# Altium PCB KRing_B4_A1.PcbDoc
Units mil, origin at the board's own origin, x right, y up, seen from the top; angles counter-clockwise.
Board outline 1488.19 x 1488.19 mil, 2 copper layers (Top Layer, Bottom Layer), stack 42.17 mil thick; 78 components, 48 nets, 279 pads, 213 vias.
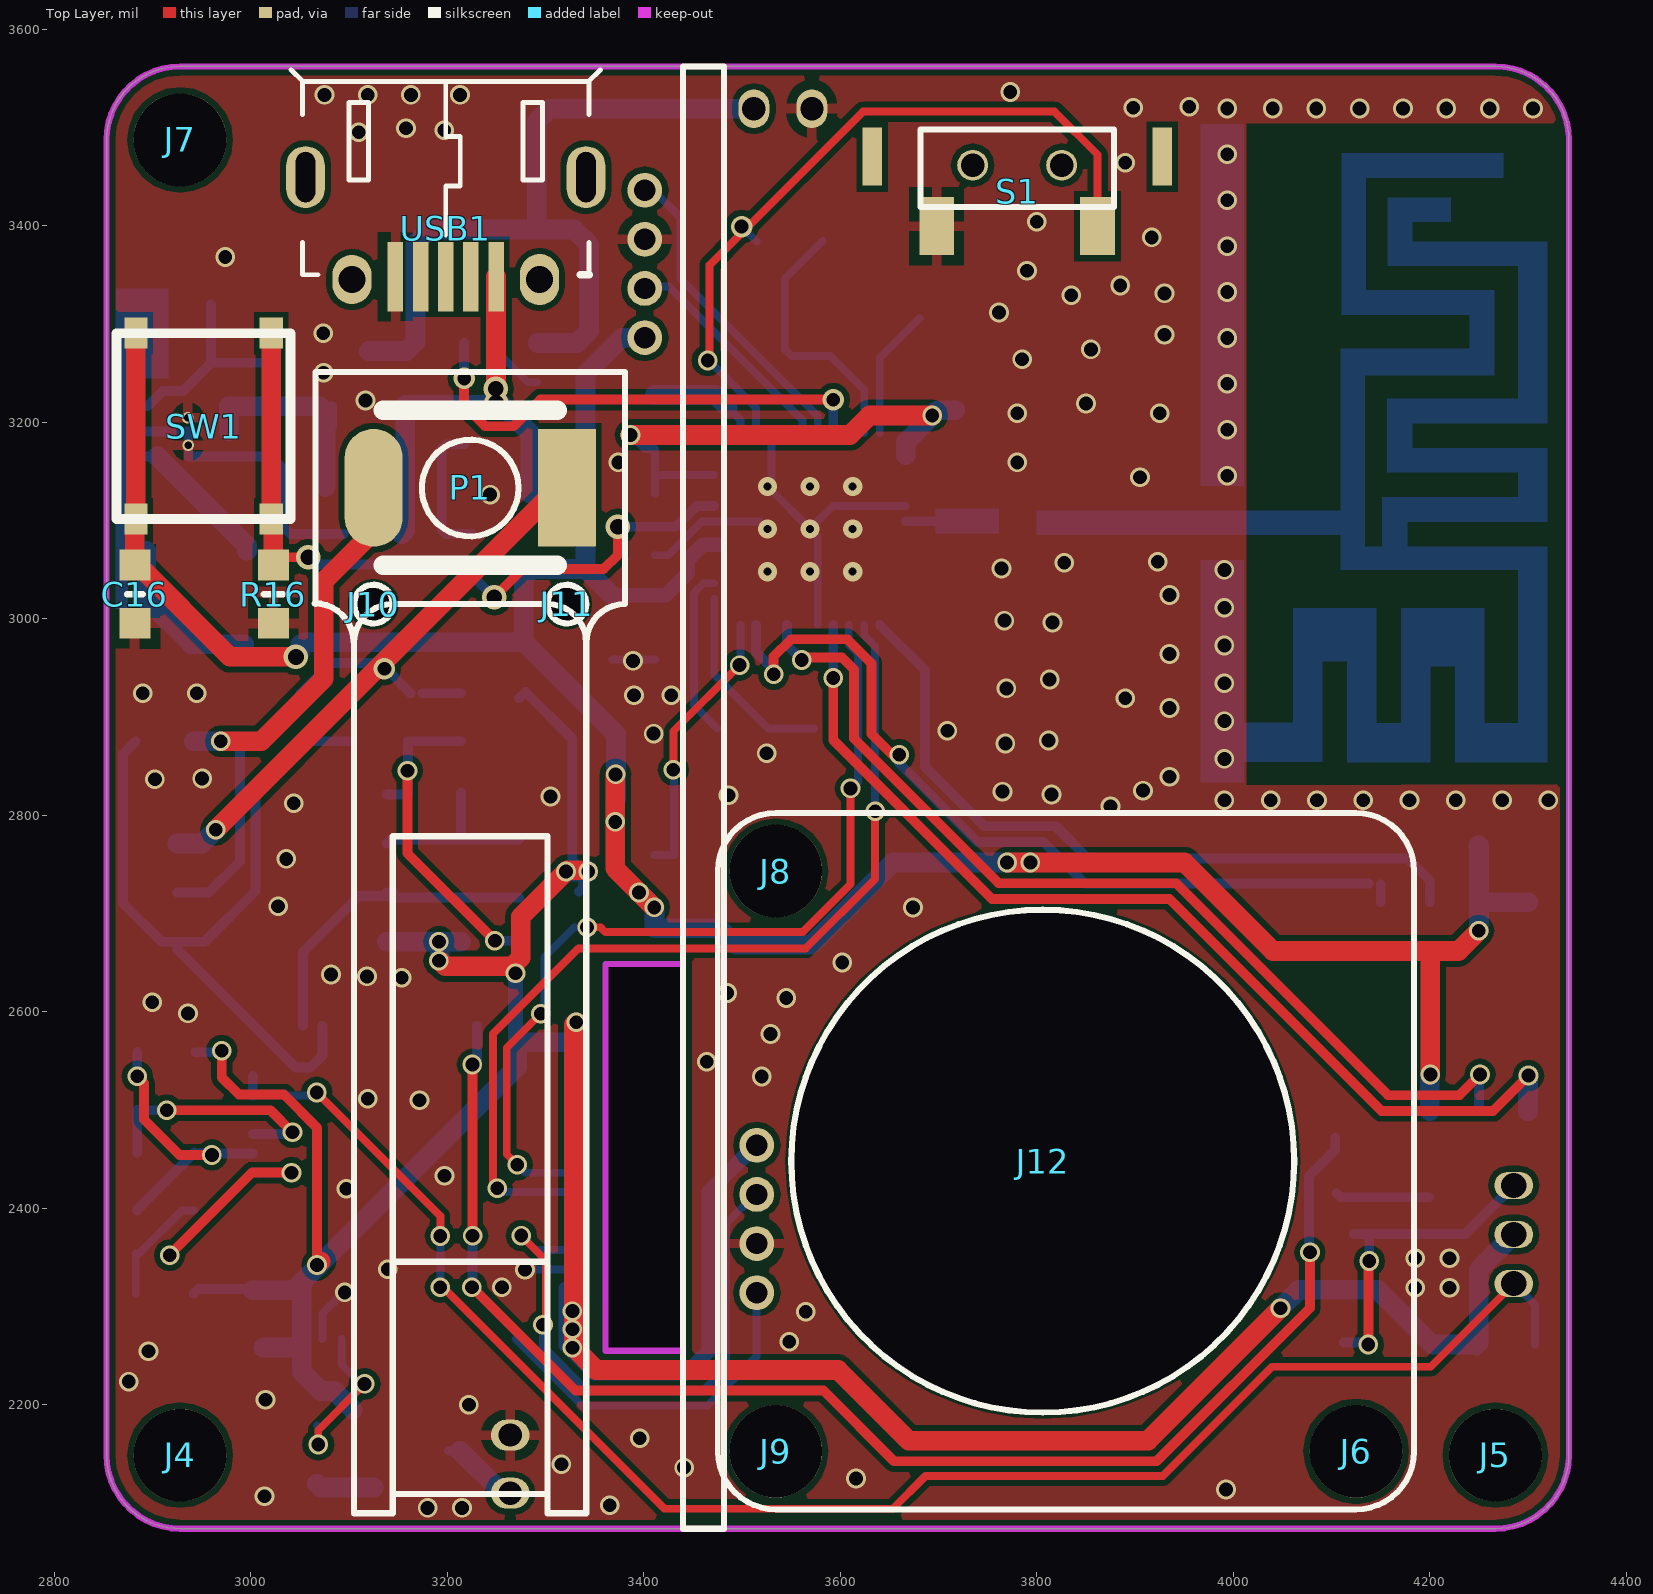
[diagram p0: Top Layer view]
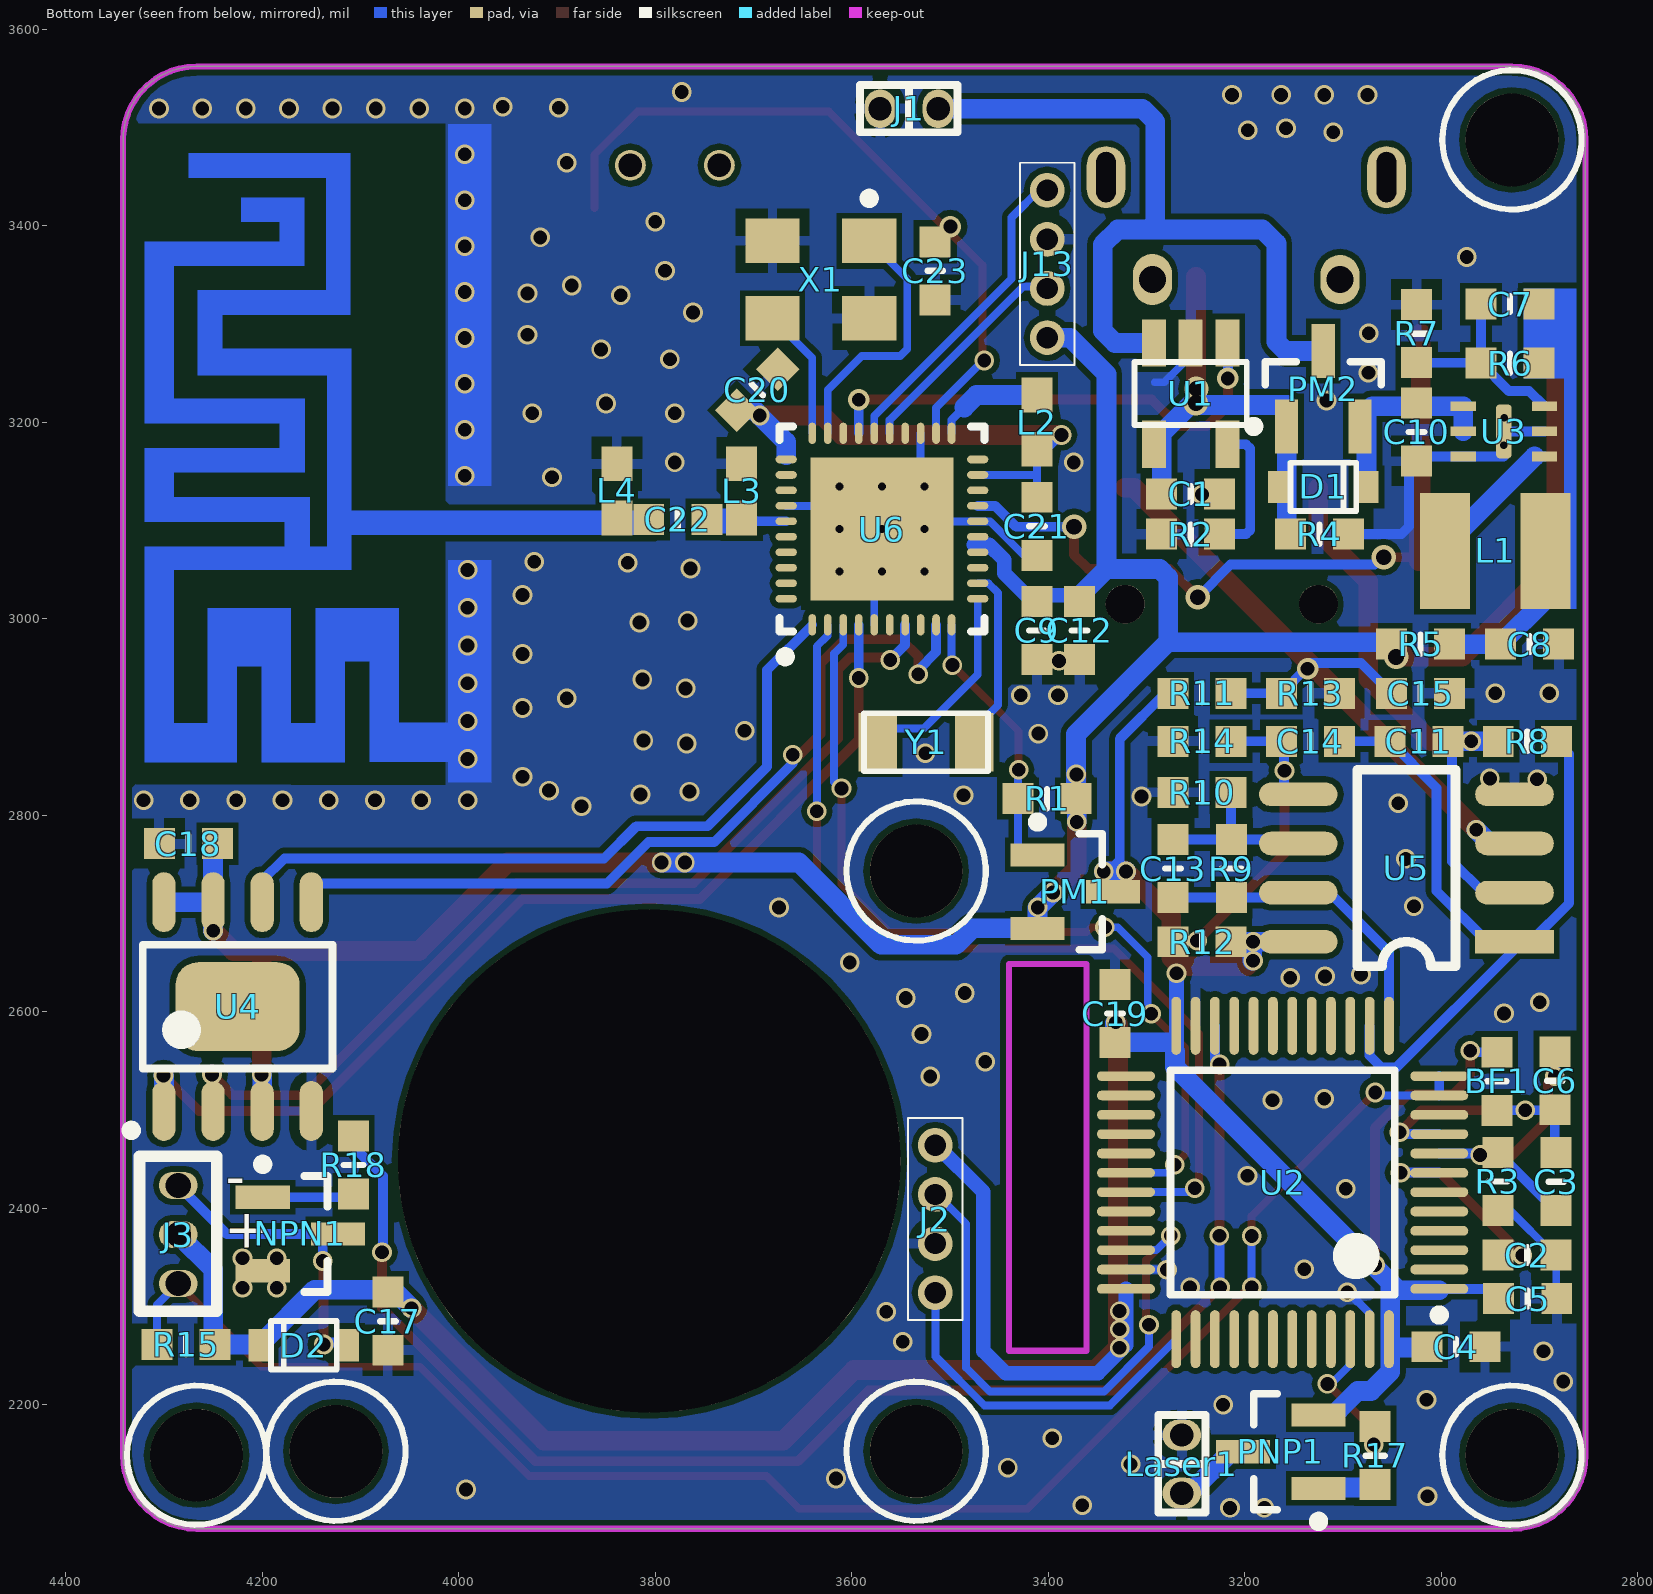
[diagram p1: Bottom Layer view, seen from below]

## Layer stack, top to bottom
Top Layer: signal copper 1.4
Dielectric: core 39.3701, FR-4, Dk 4.8
Bottom Layer: signal copper 1.4

## Board outline
2853.27,2148.65 2853.27,3487.23 cw(c2928.07,3487.23) 2928.07,3562.03 4266.65,3562.03 cw(c4266.65,3487.23) 4341.46,3487.23 4341.46,2148.65 cw(c4266.65,2148.65) 4266.65,2073.84 2928.07,2073.84 cw(c2928.07,2148.65)
cut-out: 3361.47,2648.19 3440.47,2648.19 3440.47,2255.19 3361.47,2255.19

## Design rules (kind name [scope] priority, off if disabled: settings)
Clearance "6mil Special" [(HasFootprint('FPC 0.5mm 4P') OR HasFootprint('FPC 0.5mm 16P') OR HasFootprint('QFN40P500X500X90_HS-41L'))] p1: gap=6
Clearance "8mil all" [All] p2: gap=6
ComponentClearance [All] p1: gap=-3937.01 collisioncheckmode=3 verticalgap=10 showdistances=FALSE
Height [All] p1: minheight=0 maxheight=2000 prefheight=500
HoleSize [All] p1: absolutevalues=TRUE maxlimit=71537.31 minlimit=0 maxpercent=80.000 minpercent=20.000
HoleToHoleClearance [All] p1: gap=8 allowstackedmicrovias=TRUE
MinimumSolderMaskSliver [All] p1: minsoldermaskwidth=0
PolygonConnect PolygonConnect_1 [isvia] p1: connectstyle=Direct reliefconductorwidth=10 reliefentries=4 polygonreliefangle="90 Angle" airgapwidth=10
PolygonConnect [All] p2: connectstyle=Relief reliefconductorwidth=10 reliefentries=4 polygonreliefangle="90 Angle" airgapwidth=10
RoutingCorners [All] p1: cornerstyle=45-Degree minsetback=10 maxsetback=100
RoutingVias [All] p1: holewidth=14 width=20 viastyle="Through Hole" minholewidth=14 minwidth=20 maxholewidth=100 maxwidth=200
SilkToSilkClearance [All] p1: silktosilkclearance=0
SilkToSolderMaskClearance [IsPad] p1: minsilkscreentomaskgap=0 clearancetoexposedcopper=TRUE
SolderMaskExpansion [All] p1: expansion=4
Width 20mil_Power [(InNet('EP_SUPPLY&VBAT') OR InNet('PSUPPLY') OR InNet('P_3.3V') OR InNet('PSUPPLYBAT') OR InNet('P_3.3V') OR InNet('P_5V'))] p1: maxlimit=39370.08 minlimit=8 preferedwidth=20
Width 8mil_Basic [All] p2: maxlimit=3937.01 minlimit=8 preferedwidth=10
20 further rules are at their usual default settings.

## Components (designator, comment, footprint, x,y, rotation, side; value= is the part's Value field where it differs from the comment)
BF1 "BF" R0603 2943.47,2529.19 r90 bottom
C1 "1uf" C0603 3255,3127 r180 bottom
C2 "1uf" C0603 2912.53,2352.19 r0 bottom
C3 "1uf" C0603 2883,2427 r90 bottom (schematic designator C4)
C4 "1uf" C0603 2985,2259 r0 bottom
C5 "1uf" C0603 2912,2308 r0 bottom (schematic designator C7)
C6 "0.1uf" C0603 2884.47,2529.71 r270 bottom (schematic designator C21)
C7 "22pf" C0603 2930,3320 r0 bottom
C8 "1uf" C0603 2910,2974 r180 bottom
C9 "1uf" C0603 3411.47,2988 r270 bottom
C10 "6.8pF" C0603 3025,3190 r270 bottom
C11 "6.8pf" C0603 3022.8,2875.19 r180 bottom
C12 "10uf" C0603 3368,2988 r90 bottom
C13 "240pF" C0603 3273,2745.71 r90 bottom
C14 "0.15uf" C0603 3133.13,2875.19 r180 bottom
C15 "1uf" C0603 3021,2924 r180 bottom
C16 "1uf" C0603 2882,3024.84 r270 top
C17 "1uf" C0603 4072,2285 r270 bottom
C18 "10uf" C0603 4275,2771 r180 bottom
C19 "10uf" C0603 3332,2598 r270 bottom
C20 "1uf" C0603 3696,3233 r135 bottom
C21 "1uf" C0603 3411.47,3094 r270 bottom
C22 "10uf" C0603 3777,3101 r0 bottom
C23 "10uf" C0603 3515,3354 r90 bottom
D1 "1N5817" SOD323(0805) 3120,3134 r180 bottom
D2 "1N5817" SOD323(0805) 4157.6,2260.54 r0 bottom
J1 "CON2" BATTRY_CONNECTOR 3512,3519 r0 bottom
J2 "CON4" "CON4 1MM" 3515,2389 r90 bottom
J3 "CON3" "Motor Connector" 4285.38,2373.23 r270 bottom
J4 "CON1" 2.4mm#1 2928.07,2148.19 r0 top
J5 "CON1" 2.4mm#2 4270.47,2148.19 r0 top
J6 "CON1" 2.4mm#3 4126.47,2155.19 r0 top
J7 "CON1" 2.4mm#4 2931.47,3488.19 r0 top
J8 "CON1" 2.4mm#5 3534.47,2743.19 r0 top
J9 "CON1" 2.4mm#6 3529.47,2154.19 r0 top
J10 "CON1" 0.5mm 3124.92,3014.79 r0 top
J11 "CON1" 0.5mm 3321.77,3014.79 r0 top
J12 "CON1" 6.5mm 3808.47,2450.19 r0 top
J13 "CON4" "CON4 1MM" 3401,3361 r270 bottom
L1 "4.7uh" GDNR3012 2945,3069 r90 bottom
L2 "2.2uh" L0603 3411.47,3200.02 r270 bottom
L3 "NC" L0603 3712,3130 r270 bottom
L4 "NC" L0603 3839,3130 r270 bottom
Laser1 "Laser" BATTRY_CONNECTOR 3264,2110 r90 bottom
NPN1 "8050" SOT23-3 4161,2373.82 r180 bottom
P1 "photodetector" BPW34 3223.47,3133.19 r180 top
PM1 "Si2303" SOT23-3 3372.44,2722.15 r180 bottom
PM2 "Si2303" SOT23-3 3120,3234 r90 bottom
PNP1 "8550" SOT23-3 3163.27,2152.16 r0 bottom
R1 "1K" R0603 3401.18,2816.87 r180 bottom
R2 "1K" R0603 3255,3086 r180 bottom
R3 "1K" R0603 2942.47,2427.19 r90 bottom (schematic designator R14)
R4 "1K" R0603 3124,3086 r180 bottom
R5 "1K" R0603 3021,2974 r180 bottom
R6 "1K" R0603 2930,3260 r180 bottom
R7 "1K" R0603 3025,3290 r90 bottom
R8 "10M" R0603 2912.47,2875.19 r180 bottom
R9 "220K" R0603 3213.47,2745.71 r270 bottom
R10 "3K" R0603 3243.47,2823.19 r180 bottom
R11 "4.7K" R0603 3243.47,2924 r0 bottom (schematic designator R6)
R12 "2M" R0603 3243.47,2671.19 r180 bottom
R13 "1K" R0603 3133.13,2924 r0 bottom
R14 "510" R0603 3243.47,2875.19 r180 bottom
R15 "1K" R0603 4277.38,2261.23 r180 bottom
R16 "1K" R0603 3023.07,3024.84 r270 top
R17 "1K" R0603 3067.27,2148.16 r90 bottom
R18 "1K" R0603 4107,2444 r90 bottom
S1 "SW_Mini" SW_Mini 3780,3450.54 r180 top
SW1 "SW_MINI2" SW_MINI2 2952,3196 r270 top
U1 "LTC4054" LTC4054 3255,3229 r0 bottom
U2 "STM32F103C8T6" TSQFP50P900X900X160-48L 3161.47,2426.19 r0 bottom
U3 "TPS62260" QFN2X2-6 2895,3165 r0 bottom
U4 "W25X20CLSNIG" SOIC8 4224.92,2605.18 r90 bottom
U5 "LMC6482" LMC6482 2925.47,2671.19 r0 bottom
U6 "DA14580-01AT1" QFN40P500X500X90_HS-41L 3569.21,3091.17 r90 bottom
USB1 "MicroUSB" MICROUSB 3198.47,3397.19 r270 top locked
X1 "3225 16Mhz" 3225 3631.38,3345.06 r270 bottom
Y1 "FC-135" FC-135 3524.37,2874.2 r0 bottom

## Footprints (in the part's own frame and the unit in brackets; to place one, negate y for a bottom-side part, rotate by r counter-clockwise, add the part's x,y. Pads: shape width x height; smd on the part's side, far side on the other; paste and mask are expansions set on the pad)
0.5mm [mm]
  round 1 hole 1: 1(0,0)
2.4mm#1 [mm]
  round 2.4 hole 2.4: 1(0,0.012)
2.4mm#2 [mm]
  round 2.4 hole 2.4: 1(-0.097,0.012)
2.4mm#3 [mm]
  round 2.4 hole 2.4: 1(-0.039,-0.066)
2.4mm#4 [mm]
  round 2.4 hole 2.4: 1(-0.086,-0.024)
2.4mm#5 [mm]
  round 2.4 hole 2.4: 1(-0.002,-0.001)
2.4mm#6 [mm]
  round 2.4 hole 2.4: 1(0.125,-0.041)
6.5mm [mm]
  round 13 hole 13 unplated: ""(-0.062,-0.059)
3225 [mm]
  rect 1.15x1.4 smd: 1(-1,1.25) 2(-1,-1.25) 3(1,-1.25) 4(1,1.25)
  silkscreen extent -2.22,1.13 -1.98,1.37, body extent -1.25,-1.6 1.25,1.6, height 0.7
BATTRY_CONNECTOR [mm]
  oval 0.8x1 hole 0.6: 1(0,0) 2(1.5,0)
  silkscreen extent -0.5,-0.61 2.02,0.61
BPW34 [mm]
  rect 1.5x3.048 smd: A(-2.5,0)
  oval 1.5x3.048 smd: C(2.5,0)
  silkscreen extent -2.25,-2 2.25,2
C0603 [mm]
  rect 0.8x0.8 smd: 1(-0.75,0) 2(0.75,0)
  silkscreen extent 0,-0.2 0,0.2, body extent -0.8,-0.4 0.8,0.4, height 0.8
"CON4 1MM" [mm]
  round 0.9 hole 0.55: 1(-1.905,0) 2(-0.635,0) 3(0.635,0) 4(1.905,0)
  silkscreen extent -2.62,-0.7 2.62,0.7
FC-135 [mm]
  rect 1x1.5 smd: 1(-1.25,0) 2(1.25,0)
  silkscreen extent -1.6,-0.75 1.6,0.75, body extent -1.6,-0.75 1.6,0.75, height 0.8
GDNR3012 [mm]
  rect 3x1.3 smd: 1(0,1.3) 2(0,-1.3)
  body extent -1.5,-1.5 1.5,1.5, height 1.2
L0603 [mm]
  rect 0.9x0.8 smd: 1(-0.7,0) 2(0.7,0)
  body extent -0.8,-0.4 0.8,0.4, height 0.8
LMC6482 [mil]
  rect 80x24 smd: 1(0,0)
  oval 80x24 smd: 2(0,-50) 3(0,-100) 4(0,-150) 5(220,-150) 6(220,-100) 7(220,-50) 8(220,0)
  silkscreen extent 60,-175 160,25, body extent 24,-176 196,27, height 43
LTC4054 [mm] "TSQFP, 48-Leads, Body 7.00x7.00mm, Pitch 0.50mm, IPC High Density"
  rect 0.62x1.22 smd: 1(-0.95,-1.31) 2(0,-1.31) 3(0.95,-1.31) 4(0.95,1.31) 5(-0.95,1.31)
  silkscreen extent -1.45,-0.81 1.45,0.81, body extent -1.45,-0.82 1.45,0.81, height 1
MICROUSB [mm]
  oval 1.6x1 hole 0.5 slot 1.3 at 0 deg unplated: 0(-1.325,3.625) 0(-1.325,-3.625)
  rect 1.8x0.4 smd: 1(1.25,1.3) 2(1.25,0.65) 3(1.25,0) 4(1.25,-0.65) 5(1.25,-1.3)
  oval 1.321x1.016 hole 0.7 unplated: ""(1.325,2.425)
  oval 1.27x1.016 hole 0.7 unplated: ""(1.325,-2.425)
  silkscreen extent -4.1,-4 1.2,4, body extent -3.62,-3.96 1.81,4.02, height 2.99
"Motor Connector" [mm]
  oval 0.7x1 hole 0.65: 1(-1.27,0) 2(0,0) 3(1.27,0)
  silkscreen extent -2.02,-1 1.98,1
QFN2X2-6 [mm]
  rect 0.65x0.25 smd: 1(0,0) 2(0,-0.65) 3(0,-1.3) 4(2.1,-1.3) 5(2.1,-0.65) 6(2.1,0)
  round 0.3 hole 0.2: 7(1.04,-1) 7(1.05,-0.29)
  rrect50% 0.4x1.4 smd: 7(1.05,-0.65)
  body extent 0.22,-1.59 1.86,0.29, height 0.8
QFN40P500X500X90_HS-41L [mm] "QFN, 40-Leads, Body 5.00x5.00mm, Pitch 0.40mm, Thermal Pad 3.70x3.70mm, IPC High Density"
  oval 0.55x0.2 smd: 1(-2.475,1.8) 2(-2.475,1.4) 3(-2.475,1) 4(-2.475,0.6) 5(-2.475,0.2) 6(-2.475,-0.2) 7(-2.475,-0.6) 8(-2.475,-1) 9(-2.475,-1.4) 10(-2.475,-1.8) 21(2.475,-1.8) 22(2.475,-1.4) 23(2.475,-1) 24(2.475,-0.6) 25(2.475,-0.2) 26(2.475,0.2) 27(2.475,0.6) 28(2.475,1) 29(2.475,1.4) 30(2.475,1.8)
  oval 0.2x0.55 smd: 11(-1.8,-2.475) 12(-1.4,-2.475) 13(-1,-2.475) 14(-0.6,-2.475) 15(-0.2,-2.475) 16(0.2,-2.475) 17(0.6,-2.475) 18(1,-2.475) 19(1.4,-2.475) 20(1.8,-2.475) 31(1.8,2.475) 32(1.4,2.475) 33(1,2.475) 34(0.6,2.475) 35(0.2,2.475) 36(-0.2,2.475) 37(-0.6,2.475) 38(-1,2.475) 39(-1.4,2.475) 40(-1.8,2.475)
  rect 3.7x3.7 smd: 41(0,0)
  silkscreen extent -3.42,-2.65 2.65,2.65, body extent -2.5,-2.5 2.5,2.5, height 0.9
R0603 [mm]
  rect 0.8x0.8 smd: 1(-0.75,0) 2(0.75,0)
  silkscreen extent 0,-0.25 0,0.25, body extent -0.8,-0.4 0.8,0.4, height 0.5
SOD323(0805) [mm]
  rect 0.63x0.83 smd: A(-1.115,0) C(1.115,0)
  silkscreen extent -0.85,-0.63 0.85,0.63, body extent -0.85,-0.63 0.86,0.63, height 1.1
SOIC8 [mm] "QFN, 40-Leads, Body 5.00x5.00mm, Pitch 0.40mm, Thermal Pad 3.70x3.70mm, IPC High Density"
  oval 1.55x0.6 smd: 1(-2.7,1.905) 2(-2.7,0.635) 3(-2.7,-0.635) 4(-2.7,-1.905) 5(2.7,-1.905) 6(2.7,-0.635) 7(2.7,0.635) 8(2.7,1.905)
  rrect50% 2.3x3.2 smd: 9(0,0)
  silkscreen extent -3.32,-2.45 1.6,2.88, body extent -1.65,-2.41 1.65,2.41, height 1.35
SOT23-3 [mm]
  rect 1.4x0.6 smd: 1(-0.975,0.95) 2(-0.975,-0.95) 3(0.975,0)
  silkscreen extent -1.1,-1.5 0.7,1.92, body extent -0.7,-1.5 0.7,1.5, height 1
SW_Mini [mm]
  rect 0.9x1.5 smd: 1(2.08,1.3) 2(-2.08,1.3)
  rect 0.5x1.5 smd: ""(-3.75,-0.5) ""(3.75,-0.5)
  round 0.8 hole 0.6: ""(-1.15,-0.277) ""(1.15,-0.277)
  silkscreen extent -2.5,-1.2 2.5,0.8, body extent -3.76,-2.28 3.74,1.72, height 3.4
SW_MINI2 [mm]
  rect 0.8x0.6 smd: 1(-2.4,1.75) 2(2.4,1.75) 3(-2.4,-1.75) 4(2.4,-1.75)
  silkscreen extent -2.4,-2.25 2.4,2.25, body extent -2.4,-2.28 2.4,2.25, height 0.5
TSQFP50P900X900X160-48L [mm] "TSQFP, 48-Leads, Body 7.00x7.00mm, Pitch 0.50mm, IPC High Density"
  oval 1.5x0.25 smd: 1(-4.05,2.75) 2(-4.05,2.25) 3(-4.05,1.75) 4(-4.05,1.25) 5(-4.05,0.75) 6(-4.05,0.25) 7(-4.05,-0.25) 8(-4.05,-0.75) 9(-4.05,-1.25) 10(-4.05,-1.75) 11(-4.05,-2.25) 12(-4.05,-2.75) 25(4.05,-2.75) 26(4.05,-2.25) 27(4.05,-1.75) 28(4.05,-1.25) 29(4.05,-0.75) 30(4.05,-0.25) 31(4.05,0.25) 32(4.05,0.75) 33(4.05,1.25) 34(4.05,1.75) 35(4.05,2.25) 36(4.05,2.75)
  oval 0.25x1.5 smd: 13(-2.75,-4.05) 14(-2.25,-4.05) 15(-1.75,-4.05) 16(-1.25,-4.05) 17(-0.75,-4.05) 18(-0.25,-4.05) 19(0.25,-4.05) 20(0.75,-4.05) 21(1.25,-4.05) 22(1.75,-4.05) 23(2.25,-4.05) 24(2.75,-4.05) 37(2.75,4.05) 38(2.25,4.05) 39(1.75,4.05) 40(1.25,4.05) 41(0.75,4.05) 42(0.25,4.05) 43(-0.25,4.05) 44(-0.75,4.05) 45(-1.25,4.05) 46(-1.75,4.05) 47(-2.25,4.05) 48(-2.75,4.05)
  silkscreen extent -4.17,-2.9 2.9,3.55, body extent -3.5,-3.5 3.5,3.5, height 1.6

## Part data
BF1: "磁珠"
C1 C2 C3 C4 C5 C6 C7 C8 C9 C10 C11 C12 C13 C14 C15 C16 C17 C18 C19 C20 C21 C22 C23: library part C
D1 D2: library part Diode
L1 L2 L3 L4: library part L
NPN1: library part NPN
PM1 PM2: library part PMOS
PNP1: library part PNP
R1 R2 R3 R4 R5 R6 R7 R8 R9 R10 R11 R12 R13 R14 R15 R16 R17 R18: library part R

## Via types
v1: diameter 20, hole 14, Top Layer to Bottom Layer, 194 vias
v2: diameter 19.68, hole 7.87, Top Layer to Bottom Layer, 9 vias
v3: diameter 25, hole 16, Top Layer to Bottom Layer, 6 vias
v4: diameter 22, hole 14, Top Layer to Bottom Layer, 4 vias

## Nets (pads, with @x,y where several pads share a name; then routed paths per layer and width w, separated by ;. In a path a pad name is that pad's centre, name@x,y a point inside that pad or via, vN(x,y) a via of type N, cw(c..) or ccw(c..) an arc to the next point about the centre after c; other vN are vias at no path point)
AGND: C3.1 C6.1 R3.2 U2.8 | length 300.5
  Top Layer w10: v1(2884.47,2534.19) 2891.47,2527.19 2891.47,2490.13 2927.41,2454.19 v1(2960.47,2454.19)
  Bottom Layer w10: C3.1@2884.47,2397.66 2884.47,2398.71 R3.2 2943.47,2455.71 v1@2960.47,2455.71 ; v1(2884.47,2534.19) C6.1 ; v1(2960.47,2454.19) v1@2960.47,2455.71 ; U2.8 v1@2960.47,2455.71
C_LASER: R17.2 U2.46 | length 158.3
  Top Layer w8: v1(3068.7,2159.55) 3068.7,2174.05 v1(3115.86,2221.21)
  Bottom Layer w8: R17.2@3067.47,2178.71 3068.7,2177.48 v1(3068.7,2159.55) ; U2.46 3092.57,2240.71 3112.07,2221.21 v1(3115.86,2221.21)
C_MOTOR: R18.2 U2.22 | length 1443.7
  Top Layer w10: v1(3225.04,2319.68) 3330.38,2214.34 3582.93,2214.34 3654.78,2142.49 3921.93,2142.49 4077.93,2298.49 v1(4077.93,2355.06) ; v1(3225.55,2546.27) 3225.55,2372.19 v1(3225.79,2371.95)
  Bottom Layer w10: v1(3225.04,2319.68) 3225.79,2320.42 v1(3225.79,2371.95) ; v1(3225.55,2546.27) 3230.37,2551.08 U2.22 ; v1(4077.93,2355.06) 4076.95,2356.04 4076.95,2432.65 4103.7,2459.4 R18.2@4103.7,2471.4
CHARGE_STATES: U1.1 U6.27 | length 493.6
  Top Layer w10: v4(3217.17,3244.47) 3217.17,3216.97 3238.27,3195.87 3267.68,3195.87 3294.69,3222.87 v4(3592.83,3222.87)
  Bottom Layer w10: v4(3217.17,3244.47) 3217.17,3280.14 U1.1 ; U6.27 v4(3592.83,3222.87)
DA_RXD: U2.30 U6.3 | length 909.1
  Top Layer w8: v1(3271.22,2444.16) 3260.51,2454.87 3260.51,2563.18 v1(3295.17,2597.84) ; v1(3342.28,2685.93) 3355.91,2685.93 3360.87,2680.96 3561.57,2680.96 3610.39,2729.78 v1(3610.39,2827.23)
  Bottom Layer w8: v1(3271.22,2444.16) 3279.35,2436.03 U2.30 ; v1(3295.17,2597.84) 3298.74,2601.41 3298.74,2655.38 3329.29,2685.93 v1(3342.28,2685.93) ; 3608.58,2980.22 3608.58,2973.7 ; U6.3 3608.58,2973.7 ; v1(3610.39,2827.23) 3611.32,2827.23 3617.91,2833.83 3617.91,2964.37 3608.58,2973.7
DA_TXD: U2.31 U6.2 | length 948.1
  Top Layer w8: v1(3250.83,2420.42) 3246.51,2424.73 3246.51,2577.48 3333.5,2664.47 3564.88,2664.47 3635.43,2735.02 v1(3635.43,2803.98)
  Bottom Layer w8: v1(3250.83,2420.42) 3254.9,2416.34 U2.31 ; U6.2 3624.33,2982.87 3635.43,2971.77 v1(3635.43,2803.98)
EVCC: C1.1 D1.A PM2.1 R4.1 U1.4 USB1.1 | length 482.7
  Top Layer w20: USB1.1 v3(3249.65,3219.37) v3@3251.65,3221.37
  Bottom Layer w20: R4.1 3157.4,3089.87 PM2.1 3157.4,3217.44 3247.73,3217.44 3251.65,3221.37 U1.4@3284.53,3188.49 ; C1.1 U1.4@3284.53,3188.49 ; U1.4 3292.4,3180.62 U1.4@3284.53,3188.49
  other v3: 3249.33,3233.82
F_CLK: U4.6 U6.1 | length 747.3
  Bottom Layer w10: U6.1 3686.02,2947.78 3686.02,2849.32 3746.58,2788.76 3819.29,2788.76 3852.05,2756.01 4177.36,2756.01 4199.92,2733.45 U4.6
F_CS: U4.1 U6.4 | length 1032.4
  Top Layer w10: v1(3592.88,2939.56) 3592.88,2876.28 3754.39,2714.76 3935.02,2714.76 4150.74,2499.05 4264.38,2499.05 v1(4300.35,2535.02)
  Bottom Layer w10: U6.4 3592.88,2993.68 v1(3592.88,2939.56)
  Bottom Layer w20: U4.1 4299.92,2534.59 v1(4300.35,2535.02)
F_MISO: U4.2 U6.7 | length 1005.5
  Top Layer w10: v1(3560.87,2957.98) 3563.45,2960.56 3601.58,2960.56 3613.88,2948.26 3613.88,2877.91 3761.02,2730.76 3941.65,2730.76 4157.37,2515.05 4230.02,2515.05 v1(4251.06,2536.09)
  Bottom Layer w10: U6.7 3545.59,2973.25 v1(3560.87,2957.98) ; U4.2 4249.92,2534.94 v1(4251.06,2536.09)
F_MOSI: U4.5 U6.9 | length 857.3
  Top Layer w10: v1(3532.17,2943.33) 3532.17,2961.52 3549.62,2978.98 3607.23,2978.98 3631.68,2954.52 3631.68,2882.73 3652.98,2861.43 v1(3660.1,2861.43)
  Bottom Layer w10: U6.9 3514.09,2965.89 3532.17,2947.82 v1(3532.17,2943.33) ; v1(3660.1,2861.43) 3660.1,2852.45 3739.79,2772.76 3806.67,2772.76 3849.13,2730.3 4137.6,2730.3 ; U4.5 U4.5@4149.92,2729.71
GND: C1.2 C2.1 C4.1 C5.1 C8.2 C9.2 C10.2 C12.1 C15.2 C16.2 C17.2 C18.1 C19.1 C20.2 C21.2 C23.1 J1.2 J2.2 J13.2 L3.1 L4.1 Laser1.2 NPN1.2 R2.1 R3.1 R4.2 R7.2 R10.1 R13.1 R14.1 R16.2 S1.1 U1.2 U2.23 U2.35 U2.47 U3.2 U3.6 U3.7 U4.4 U5.4 U6.5 U6.16 U6.23 U6.34 U6.41 USB1.5 X1.2 X1.4 | length 1068.3
  Bottom Layer w8: C5.1@2882.94,2313.19 2882.94,2354.19 2886.63,2354.19 2930.11,2397.66 R3.1 ; U2.47 3072.89,2292.76 3094.44,2314.32 v1(3095.71,2314.32) ; U1.2 3255,3267.61 3282.02,3240.59 3291.42,3240.59 ; v1(3279.14,2337.25) 3279.49,2337.6 U2.35 ; C12.1 C9.2 ; C21.2 3424.75,3064.47 3459.32,3099.04 U6.16 3518.03,3099.04 v2(3525.91,3091.17) ; U6.23 3529.84,3130.54 v2(3569.21,3091.17) ; U6.5 3577.09,3083.29 v2(3569.21,3091.17) ; U6.34 3592.83,3114.79 v2(3569.21,3091.17)
  Bottom Layer w10: U3.2 2936.34,3190.59 2936.34,3165 U3.6 3020.47,3165 C10.2 3032.77,3152.7 3032.77,3093.72 3040.5,3086 R4.2
  other v1: 3180,2095 3215,2095 3365.35,2097.58 3013.94,2106.83 3992.48,2113.69 3616,2125 3441,2136 3316.14,2139.55 3396,2166 3222,2200 3015,2205 2875.91,2223.57 2895.94,2254.35 3548,2264 3564.84,2294.55 3255.59,2319.47 4185,2319 4220,2319 3139.33,2337.9 4185,2349 4220,2349 3097.2,2419.75 3197.2,2433.06 3171.81,2509.83 3119.02,2511.28 3520,2534 3464,2549 3528.9,2577.27 2936.1,2598.25 2899.65,2609.71 3545,2614 3485,2619 3153.78,2634.63 3118.31,2635.93 3081.73,2637.9 3602,2650 3674,2706 3027.83,2707.19 3036.02,2755.5 3875,2809 3043.82,2812.03 3990.91,2815.26 4038.01,2815.26 4085.11,2815.26 4132.22,2815.26 4179.32,2815.26 4226.42,2815.26 4273.53,2815.26 4320.63,2815.26 3305,2819 3486.18,2820.28 3815,2821 3765,2824 3908,2825 2902.44,2836.56 2950.51,2837.31 3935,2839 3990.91,2857.27 3525,2863 3768,2873 3812,2876 3410,2883 3709,2886 3990.91,2895.73 3935,2909 3890,2919 3390,2922 3428,2922 2890,2924 2945,2924 3769,2929 3990.91,2934.2 3813,2938 3389,2957 3935,2964 3990.91,2972.66 3816,2996 3767,2998 3990.91,3011.13 3935,3024 3990.91,3049.59 3764,3051 3828,3057 3923,3058 3243.58,3126.26 3905,3144 3993.78,3145.54 3374,3159 3780,3159 3993.78,3192.25 3780,3209 3925,3209 3850,3219 3116.81,3221.97 3993.78,3238.96 3074.13,3250.35 3785,3264 3855,3274 3993.78,3285.67 3930,3289 3073.7,3290.55 3761.46,3311.56 3835,3329 3930,3331 3993.78,3332.39 3885,3339 3790,3354 2974,3368 3993.78,3379.1 3917,3388 3800,3404 3993.78,3425.81 3890,3464 3993.78,3472.52 3110,3495 3197,3497 3158,3499 3993.78,3519.24 4040.2,3519.24 4084.33,3519.24 4128.46,3519.24 4172.6,3519.24 4216.73,3519.24 4260.87,3519.24 4305,3519.24 3898,3520 3955,3521 3075,3533 3119,3533 3163,3533 3213,3533 3773,3536
  other v2: 3525.91,3047.86 3569.21,3047.86 3612.52,3047.86 3612.52,3091.17 3525.91,3134.47 3569.21,3134.47 3612.52,3134.47
LASER_STATE: PM1.1 R1.1 U6.10 | length 282.6
  Top Layer w8: v1(3430.08,2846.2) 3430.08,2885.27 v1(3497.53,2952.72)
  Bottom Layer w8: PM1.1 3430.71,2759.55 R1.1 3430.71,2845.57 v1(3430.08,2846.2) ; v1(3497.53,2952.72) 3498.35,2953.53 U6.10
M_SIG: J3.3 R15.1 U2.11 U2.12 | length 1687.9
  Top Layer w8: v1(3067.17,2517.78) 3192.97,2391.98 v1(3192.97,2371.73) ; v1(3192.97,2319.68) 3195.62,2319.68 3421.1,2094.2 3653.46,2094.2 3686.76,2127.49 3928.14,2127.49 4039.34,2238.69 4200.84,2238.69 J3.3
  Bottom Layer w8: U2.11 3064.16,2514.77 v1(3067.17,2517.78) ; v1(3192.97,2319.68) v1(3192.97,2371.73) ; J3.3 4306.91,2301.7 R15.1
  Bottom Layer w10: U2.11 U2.12
NetC2_2: C2.2 U2.7 | length 198.3
  Top Layer w10: v1(2917.47,2352.19) 3001.47,2436.19 v1(3041.47,2436.19)
  Bottom Layer w10: U2.7 3002.18,2436.19 v1(3041.47,2436.19)
NetC7_1: C7.1 C8.1 L1.2 R5.2 R6.2 | length 198.9
  Bottom Layer w10: L1.2@2870,3092.82 L1.2
  Bottom Layer w20: L1.2 2893.82,3019.71 C8.1 ; C8.1@2942,2974 R5.2 R5.2@2993.27,2974
NetC7_2: C7.2 R6.1 R7.1 U3.3 | length 208.3
  Bottom Layer w10: U3.3 2910.59,3231.77 2931.3,3231.77 R6.1 ; C7.2 R6.1 ; R7.1 2960,3260.47 R6.1
NetC10_1: C10.1 D1.C PM2.2 U3.4 U3.5 | length 237.1
  Bottom Layer w10: C10.1@3021.65,3216.18 C10.1 ; PM2.2@3076.1,3189.12 PM2.2 PM2.2@3082.6,3216.18
  Bottom Layer w20: U3.5 U3.4 3021.65,3216.18 3070,3216.18 3076.1,3210.08 3076.1,3189.12 D1.C
NetC11_2: C11.2 P1.C R8.1 U5.2 | length 592.4
  Top Layer w20: v1(2969.47,2875.19) 3010.62,2875.19 3074.47,2939.03 3074.47,3038.19 3125.04,3088.76 P1.C
  Bottom Layer w10: U5.2 2957.19,2721.19 2988.94,2752.94 C11.2@2988.94,2875.19
  Bottom Layer w20: R8.1 v1(2969.47,2875.19) C11.2@2988.94,2875.19
NetC13_2: C13.2 R9.1 R10.2 U5.6 | length 184.3
  Bottom Layer w10: U5.6@3138.47,2771.19 3142.52,2775.24 R9.1 ; R10.2 3213.94,2775.71 R9.1 ; C13.2 R9.1
NetC14_1: C14.1 R12.1 R14.2 U5.5 | length 364.3
  Top Layer w10: v1(3159.47,2845.19) 3159.47,2761.19 v1(3248.47,2672.19)
  Bottom Layer w10: U5.5@3138.47,2821.19 3160,2821.19 3160,2875.19 R14.2 ; v1(3248.47,2672.19) 3272,2672.19 R12.1
NetC20_1: C20.1 C21.1 L2.2 U6.19 U6.31 | length 529
  Top Layer w20: v1(3386.5,3186.95) 3609.88,3186.95 3629.65,3206.72 v1(3693.62,3206.72)
  Bottom Layer w8: v1(3386.5,3186.95) 3400.98,3172.46 L2.2 3411.47,3146.28 ; C21.1@3411.47,3127.19 3411.47,3146.28 ; U6.19 3411.47,3146.28
  Bottom Layer w20: 3666.65,3166.22 3666.65,3179.75 v1(3693.62,3206.72) 3699.03,3212.12 C20.1
NetC22_1: C22.1 L3.2 U6.35 | length 32
  Bottom Layer w10: U6.35 3696.81,3099.04 L3.2@3697.05,3099.28 ; L3.2@3705.71,3098.8 L3.2@3706.77,3097.74
NetC22_2: C22.2 L4.2
NetD2_A: D2.A J3.1 NPN1.3 | length 337.7
  Top Layer w10: v1(4137.38,2261.23) 4137.38,2345.23 v1(4138.38,2346.23)
  Bottom Layer w10: D2.A@4112.48,2263.23 4135.38,2263.23 v1(4137.38,2261.23) ; v1(4138.38,2346.23) 4138.38,2373.82 NPN1.3 4235.98,2373.82 J3.1
NetL1_1: L1.1 U3.1 | length 143.8
  Bottom Layer w10: U3.1 U3.1@2905.09,3165
  Bottom Layer w20: U3.1@2905.09,3165 2996.18,3073.91 L1.1
NetL2_1: L2.1 U6.21 | length 111
  Bottom Layer w8: 3485.59,3214.91 3498.35,3202.15 U6.21
  Bottom Layer w20: L2.1 3472.91,3227.58 3485.59,3214.91
NetLaser1_1: Laser1.1 PNP1.3 | length 80
  Bottom Layer w10: PNP1.3@3201.85,2153.19 PNP1.3@3213,2153.19
  Bottom Layer w20: PNP1.3@3213,2153.19 3256.19,2110 Laser1.1
NetNPN1_1: NPN1.1 R18.1 | length 96.1
  Bottom Layer w10: R18.1@4104.91,2415.23 4108.91,2411.23 NPN1.1
NetPNP1_1: PNP1.1 R17.1 | length 59.2
  Bottom Layer w20: R17.1@3067.47,2119.66 3071.34,2115.79 PNP1.1@3125.08,2115.79
NetR2_2: R2.2 U1.5 | length 140.8
  Bottom Layer w10: U1.5 3198.57,3177.43 3194.41,3173.27 3194.41,3090.12 3198.53,3086 R2.2
NetR16_1: R16.1 SW1.1 SW1.2 U6.17 | length 752.5
  Top Layer w10: R16.1@3023,3058.54 3026.96,3062.5 v3(3058.48,3062.5) ; v3(3247.76,3021.69) 3276.54,3050.47 3359.17,3050.47 3373.66,3064.96 v3(3373.66,3093.54)
  Top Layer w20: SW1.2 SW1.1 ; R16.1@3023,3058.54 SW1.2@3023,3099.41
  Bottom Layer w10: v3(3058.48,3062.5) 3060.45,3062.5 3067.99,3054.96 3214.49,3054.96 v3(3247.76,3021.69) ; v3(3373.66,3093.54) 3432.61,3093.54 3453.85,3114.79 U6.17
NetU6_11: U6.11 Y1.2 | length 201.2
  Bottom Layer w8: U6.11 3471.77,2943.21 3526.69,2888.29 Y1.2@3573.15,2888.29
NetU6_12: U6.12 Y1.1 | length 172.6
  Bottom Layer w8: U6.12 3460.92,3036.05 3450.94,3026.07 3450.94,2912.07 Y1.1@3474.72,2888.29
NetU6_29: U6.29 X1.1 | length 268.3
  Bottom Layer w8: X1.1 3543.5,3345.77 3543.5,3274.32 3550.55,3267.27 3589.76,3267.27 3624.33,3232.7 U6.29
NetU6_30: U6.30 X1.3 | length 133.9
  Bottom Layer w8: U6.30 3640.08,3265.18 X1.3
NSWCLK: J2.1 U2.37 | length 359.7
  Bottom Layer w8: U2.37 3337.14,2199.33 3464.97,2199.33 3514.69,2249.04 J2.1@3514.69,2315.3
NSWDIO: J2.3 U2.34 | length 581.9
  Top Layer w8: v1(3275.35,2372.12) 3300.35,2347.12 3300.35,2284.28 v1(3297.38,2281.3)
  Bottom Layer w8: v1(3275.35,2372.12) 3290.18,2357.29 U2.34 ; v1(3297.38,2281.3) 3297.38,2259.26 3343.31,2213.33 3459.17,2213.33 3483.5,2237.66 3483.5,2384.11 J2.3@3514.69,2415.3
OUT1: C11.1 C14.2 R8.2 U2.14 U5.1 | length 800.7
  Bottom Layer w10: R8.2 2870,2862.25 2870,2710.3 2909.11,2671.19 U5.1@2922.47,2671.19 ; U2.14 3072.89,2555.37 3060.62,2543.11 3045.78,2543.11 2925.47,2663.42 U5.1 2953.19,2671.19 3004.94,2722.94 3004.94,2827.8 C11.1 C14.2@3100.94,2875.19
OUT2: C13.1 R9.2 U2.13 U5.7 | length 329.1
  Bottom Layer w10: U2.13 3053.2,2660.92 3109.97,2717.69 U5.7@3141.97,2717.69 ; U5.7@3138.47,2721.19 U5.7@3141.97,2717.69 ; U5.7 U5.7@3141.97,2717.69 ; C13.1 R9.2 3143.47,2716.19 U5.7@3141.97,2717.69
P_3.3V: C9.1 C12.2 C16.1 C18.2 J13.4 PM1.2 R1.2 R5.1 SW1.3 SW1.4 U4.3 U4.7 U4.8 U6.14 U6.15 | length 2917.6
  Top Layer w20: SW1.4@2882,3100.41 2882,3057.88 2978.82,2961.07 v3(3045.97,2961.07) ; SW1.4 SW1.3 ; v1(3371.3,2841.48) 3370.91,2841.09 v1(3370.91,2793.17) 3370.91,2745.81 v1(3410.59,2706.13) ; v1(3769.72,2751.76) v1(3793.46,2751.76) 3950.35,2751.76 4040.36,2661.76 4229.06,2661.76 v1(4249.65,2682.35) ; v1(4200.51,2536.05) 4200.51,2656.42
  Bottom Layer w15: C12.2@3367.47,3023.71 3422.19,3023.71 3444.76,3046.28 3444.76,3059.74 3460.24,3075.22 3475.71,3075.22
  Bottom Layer w20: v3(3045.97,2961.07) 3050.53,2965.63 R5.1 ; R5.1@3054.33,2976 3278,2976 ; C12.2@3367.47,3023.71 3340.71,3050.47 ; v1(3370.91,2793.17) 3370.91,2816.13 R1.2 3371.65,2882.35 3278,2976 ; v1(3395.12,2721.28) 3410.28,2706.13 v1(3410.59,2706.13) 3410.83,2705.89 PM1.2 3477.25,2684.75 3493.94,2668.06 3570.06,2668.06 3653.76,2751.76 v1(3769.72,2751.76) v1(3793.46,2751.76) ; J13.4 3377.89,3286 3340.71,3248.82 3340.71,3050.47 ; U4.3 4199.92,2535.46 v1(4200.51,2536.05) ; C18.2@4249.53,2769.16 4249.92,2768.76 U4.7 ; v1(4249.65,2682.35) 4249.92,2682.62 U4.7 ; U4.8 U4.7 ; 3278,2976 3278,3041.98 3286.5,3050.47 3340.71,3050.47
P_C3.3V: BF1.2 C4.2 C5.2 C17.1 C19.2 D2.C J2.4 J3.2 PM1.3 PNP1.2 R11.2 R12.2 R15.2 U2.1 U2.24 U2.36 U2.48 U5.8 | length 3640.9
  Top Layer w10: v1(2970.47,2560.19) 2970.47,2533.19 2988,2515.66 3033.69,2515.66 3067.47,2481.89 v1(3067.47,2342.19)
  Top Layer w20: v1(3067.47,2342.19) v1@3070.97,2345.69 ; v1@3192.52,2651.83 3198.17,2646.19 3266.12,2646.19 3274.69,2654.75 3274.69,2696.48 v1(3320.83,2742.62) 3322.09,2743.88 v1@3335,2743.88 ; v1@3328.77,2258.19 3351.61,2235.34 3597.76,2235.34 3669.61,2163.49 3913.23,2163.49 v1(4047.95,2298.21) ; v1@3328.9,2258.06 3328.9,2586.95 v1(3331.22,2589.28)
  Bottom Layer w10: C5.2@2942,2313.19 2946.73,2317.92 U2.1 ; BF1.2 2969,2558.71 v1(2970.47,2560.19) ; v1(3067.47,2342.19) v1@3068.47,2341.19 ; v1(3269.37,2639.04) v1@3269.74,2638.67 ; R11.2@3273,2919 3279.5,2925.5 3327.19,2877.81 3327.19,2753.84 3338.4,2742.62 3338.4,2726.5 PM1.3 ; D2.C@4200.28,2263.23 D2.C@4202.28,2261.23 ; R15.2@4247.85,2255.23 R15.2
  Bottom Layer w15: v1(3269.37,2639.04) 3269.37,2560.97 U2.24@3270.98,2559.36 ; U2.36 3320.92,2260.47 3349.43,2231.95 3443.19,2231.95 3466,2254.76 3466,2416.61 J2.4@3514.69,2465.3
  Bottom Layer w20: U2.1@3002.02,2316.68 3043.96,2316.68 3051.96,2324.68 ; C4.2@3013,2258.19 3045,2258.19 ; 3051.96,2325.19 3051.96,2324.68 ; PNP1.2@3103.88,2195.21 3085.09,2214 3071.43,2214 3051.96,2233.47 3051.96,2324.68 ; U5.8@3138.47,2671.19 v1(3191.46,2671.19) ; v1@3192.52,2651.83 3192.52,2670.12 v1(3191.46,2671.19) ; R12.2 v1(3191.46,2671.19) ; U2.24@3270.98,2559.36 3270.98,2543.7 3068.47,2341.19 3051.96,2324.68 ; 3275.43,2568.92 3332.13,2568.92 3332.13,2588.37 v1(3331.22,2589.28) ; v1(3320.83,2742.62) 3338.4,2742.62 v1(3343.43,2742.62) ; v1(4047.95,2298.21) 4066.77,2317.03 4146.47,2317.03 D2.C@4200.28,2263.23 ; D2.C@4202.28,2261.23 R15.2 4249.7,2263.07 4249.7,2337.54 J3.2
  other v1: 3327.32,2258.06 3327.32,2276.72 3327.32,2295.3 3191.46,2651.83
SW_WAKEUP: C23.2 S1.2 U6.22 | length 747
  Top Layer w8: v1(3465,3262.78) 3467,3264.78 3467,3360 3623,3516 3818,3516 3861.89,3472.11 S1.2@3861.89,3417.82
  Bottom Layer w8: v1(3465,3262.78) 3466,3262.78 3514.09,3214.69 U6.22 ; v4(3499.53,3399) C23.2
SWCLK: J13.1 U6.26 | length 322.2
  Bottom Layer w8: J13.1@3404.92,3437.98 3407.5,3437.98 3437.32,3408.15 3437.32,3345.96 3577.09,3206.2 U6.26
SWDIO: J13.3 U6.25 | length 239.1
  Bottom Layer w8: J13.3@3404.92,3337.98 3425.51,3337.98 3561.34,3202.15 U6.25 3561.34,3201.53
V0.58: C15.1 P1.A R11.1 R13.2 U5.3 | length 725.3
  Top Layer w20: v1(2964.47,2785.19) 3312.47,3133.19 P1.A
  Bottom Layer w10: C15.1 3081.53,2955 3131.66,2955 v4@3136,2950.66 ; v4(3136,2949) v4@3136,2950.66 ; R13.2 v4@3136,2950.66 ; R13.2@3174.53,2924 R11.1
  Bottom Layer w20: U5.3 2950.47,2771.19 v1(2964.47,2785.19)
VBAT: J1.1 PM2.3 U1.3 | length 824.9
  Bottom Layer w20: PM2.3 3158.36,3272.39 3167.72,3281.74 3167.72,3381.73 3182.05,3396.06 3298.27,3396.06 ; U1.3 3332.03,3280.57 3344.61,3293.15 3344.61,3380.63 3329.17,3396.06 3298.27,3396.06 ; J1.1 3304.2,3519 3291.02,3505.83 3291.02,3403.31 3298.27,3396.06
VDDA: BF1.1 C3.2 C6.2 U2.9 | length 281.2
  Top Layer w10: v1(2914.47,2499.66) 3020,2499.66 v1(3042.47,2477.19)
  Bottom Layer w10: C3.2@2884.47,2456.71 C6.2 2885,2499.66 v1(2914.47,2499.66) BF1.1 ; U2.9 3040.68,2475.4 v1(3042.47,2477.19)
pads on no net: J4.1 J5.1 J6.1 J7.1 J8.1 J9.1 J10.1 J11.1 J12. S1. U2.2 U2.3 U2.4 U2.5 U2.6 U2.10 U2.15 U2.16 U2.17 U2.18 U2.19 U2.20 U2.21 U2.25 U2.26 U2.27 U2.28 U2.29 U2.32 U2.33 U2.38 U2.39 U2.40 U2.41 U2.42 U2.43 U2.44 U2.45 U4.9 U6.6 U6.8 U6.13 U6.18 U6.20 U6.24 U6.28 U6.32 U6.33 U6.36 U6.37 U6.38 U6.39 U6.40 USB1. USB1.0 USB1.2 USB1.3 USB1.4

## Polygon pours and split planes (outlines as drawn)
GND on Top Layer "Top Layer-No Net" (solid, remove dead copper, pour order 4): 4617.09,3654.06 2618.58,3654.06 2618.58,1999.13 2623.58,2004.13 4614.61,2004.13
GND on Bottom Layer "Top Layer-No Net" (solid, remove dead copper, pour order 3): 4557.09,3631.73 2558.58,3631.73 2558.58,1976.81 2563.58,1981.81 4554.61,1981.81

## Keep-outs
Keep-Out Layer:
  lines w6.3: 2853.27,2148.65 ccw(c2928.07,2148.65) 2928.07,2073.84 4266.65,2073.84 ccw(c4266.65,2148.65) 4341.46,2148.65 4341.46,3487.23 ccw(c4266.65,3487.23) 4266.65,3562.03 2928.07,3562.03 ccw(c2928.07,3487.23) 2853.27,3487.23 2853.27,2148.65 ; 3361.14,2254.94 3439.88,2254.94 3439.88,2648.65 3361.14,2648.65 3361.14,2254.94

## Other copper
Top Layer:
  pour cut-out: 4376.77,3504.32 4013.11,3504.32 4013.23,2830.46 4376.81,2831.4
Bottom Layer:
  rectangle net GND: 3966.36,2833.46 4010.85,3059.84
  rectangle net GND: 4010.33,2853.93 4090.77,2894.09
  rectangle net GND: 4060.85,2893.23 4090.77,3011.02
  rectangle: 4085.22,2956.3 4145.89,3011.02
  rectangle: 4115.57,2853.54 4145.89,2956.85
  rectangle: 4143.72,2853.58 4200.73,2893.74
  rectangle: 4170.41,2881.73 4200.73,2985.04
  rectangle: 4170.41,2951.22 4255.73,3011.02
  rectangle: 4225.81,2853.54 4255.73,2951.65
  rectangle: 4289.59,2853.58 4319.74,3073.5
  rectangle: 4230.92,2853.54 4316.24,2893.82
  rectangle: 4109.15,3049.49 4313.56,3073.5
  rectangle net NetC22_2: 4109.15,3049.49 4134,3274.68
  rectangle: 4151.4,3049.49 4177.03,3123.82
  rectangle: 4151.4,3098.46 4319.74,3123.82
  rectangle: 4289.51,3098.54 4319.66,3173.66
  rectangle: 4156.63,3148.5 4319.66,3173.74
  rectangle: 4156.59,3148.5 4182.38,3223.9
  rectangle: 4156.59,3198.5 4319.51,3223.94
  region: 4289.55,3383.7 4289.55,3198.5 4319.51,3198.5 4319.51,3383.7
  rectangle net NetC22_2: 3799.8,3084.88 4123.33,3110
  rectangle: 4156.91,3358.86 4319.51,3383.7
  rectangle: 4156.91,3358.86 4182.19,3428.62
  region: 4156.91,3428.62 4156.91,3403.42 4221.28,3403.42 4221.28,3428.62
  rectangle: 4109.15,3247.32 4265.77,3274.68
  rectangle: 4240.1,3247.32 4265.77,3334.41
  rectangle: 4109.98,3309.17 4265.77,3334.41
  rectangle: 4110.02,3323.94 4134.78,3473.78
  region: 4116.59,3473.78 4116.59,3448.26 4275.14,3448.26 4275.14,3473.78
  rectangle net GND: 3966.32,3135 4010.81,3503.46
  region net NetC22_1: 3696.87,3112.01 3696.87,3086.81 3761.24,3086.81 3761.24,3112.01
  rectangle net NetC7_1: 2862.48,3244.25 2916.18,3335.75
  rectangle net NetC7_1: 2862.48,3010 2875,3255
  pour cut-out: 4376.77,3504.32 4013.11,3504.32 4013.23,2830.46 4376.81,2831.4

## Silkscreen, mask and mechanical layers (free items; w line width, h text height)
Top Overlay:
  circle w6.3: c3806.02,2447.86 r255.91
  circle w6.3: c3124.92,3014.79 r19.69
  circle w6.3: c3321.77,3014.79 r19.69
  circle w6.3: c3223.35,3132.9 r49.21
  lines w6: 3475.32,2152.58 ccw(c3534.37,2152.58) 3534.37,2093.53 4124.92,2093.53 ccw(c4124.92,2152.58) 4183.98,2152.58 4183.98,2743.13 ccw(c4124.92,2743.13) 4124.92,2802.19 3534.37,2802.19 ccw(c3534.37,2743.13) 3475.31,2743.13 3475.32,2152.58
  lines w6.3: 3065.1,3015.56 cw(c3065.1,2976.19) 3104.47,2976.19 ; 3065.87,3014.79 3065.87,3251.01 3380.83,3251.01 3380.83,3014.79 ccw(c3380.83,2975.42) 3341.46,2975.42 ; 3144.61,2109.28 3302.09,2109.28 ; 3144.61,2345.5 3147.11,2345.5 3299.59,2345.5 3302.09,2345.5 ; 3481.39,3562.03 3439.88,3562.03 3439.88,2073.84 3481.47,2073.84 ; 3481.73,2073.64 3481.73,3561.84 ; 3341.46,2975.42 ccw(c3302.09,2975.42) 3302.09,3014.79 3144.61,3014.79 ccw(c3144.61,2975.42) 3105.24,2975.42 3105.24,2089.59 3144.61,2089.59 3144.61,2778.57 3302.09,2778.57 3302.09,2089.59 3341.46,2089.59 3341.46,2975.42
Bottom Overlay:
  circle w6.3: c2928.07,3487.23 r70.87
  circle w6.3: c2928.07,2148.65 r70.87
  circle w6.3: c4266.65,2148.65 r70.87
  circle w6.3: c3534.37,2152.58 r70.87
  circle w6.3: c3534.37,2743.13 r70.87
  circle w6.3: c4124.92,2152.58 r70.87
  text "-" at 4236.78,2442.72 h40 r180
  text "+" at 4238.31,2394.02 h40 r180
Mechanical 3:
  lines w6.3: 3965.33,2831.06 3965.33,3504.29 4012.58,3504.29 4012.58,2831.06 3965.33,2831.06
Mechanical 4:
  lines w6.3: 3965.33,2831.06 3965.33,3504.29 4335.41,3504.29 4335.41,2831.06 3965.33,2831.06
Mechanical 5:
  lines w3.94: 3981.08,3027.91 cw(c3981.08,3035.78) 3981.08,3043.66 cw(c3981.08,3035.78) 3981.08,3027.91 ; 3981.08,3197.2 cw(c3981.08,3205.08) 3981.08,3212.95 cw(c3981.08,3205.08) 3981.08,3197.2 ; 3981.08,3307.44 cw(c3981.08,3315.31) 3981.08,3323.19 cw(c3981.08,3315.31) 3981.08,3307.44 ; 3985.02,2835 cw(c3985.02,2842.87) 3985.02,2850.75 cw(c3985.02,2842.87) 3985.02,2835 ; 3985.02,2949.17 cw(c3985.02,2957.04) 3985.02,2964.92 cw(c3985.02,2957.04) 3985.02,2949.17 ; 3985.02,3421.61 cw(c3985.02,3429.49) 3985.02,3437.36 cw(c3985.02,3429.49) 3985.02,3421.61 ; 3988.96,3358.62 cw(c3988.96,3366.49) 3988.96,3374.37 cw(c3988.96,3366.49) 3988.96,3358.62 ; 3992.89,2909.8 cw(c3992.89,2917.67) 3992.89,2925.55 cw(c3992.89,2917.67) 3992.89,2909.8 ; 3992.89,2992.48 cw(c3992.89,3000.35) 3992.89,3008.23 cw(c3992.89,3000.35) 3992.89,2992.48 ; 3992.89,3153.9 cw(c3992.89,3161.77) 3992.89,3169.64 cw(c3992.89,3161.77) 3992.89,3153.9 ; 3992.89,3252.32 cw(c3992.89,3260.19) 3992.89,3268.07 cw(c3992.89,3260.19) 3992.89,3252.32 ; 3992.89,3468.86 cw(c3992.89,3476.73) 3992.89,3484.6 cw(c3992.89,3476.73) 3992.89,3468.86

## Text inside footprints (layer, text, board x,y; h text height)
U4: Mechanical 15 "1" at 4218.45,2622.89 h29.53 r180